# EAGLE board smartwatch-top (EAGLE 9.6.1)

Size 38 x 38 mm. Coordinates in mm from the lower left corner, seen from the top.
Outline: 0,0 38,0 38,38 0,38 0,0
Copper layers (1*16): Top 0.035mm / dielectric 1.5mm / Bottom 0.035mm
Design rules "default": minimum track width 6mil, minimum drill 0.35mm, track to track 6mil, track to pad 6mil, pad to pad 6mil, via to via 6mil, smd to smd 6mil, copper to edge 40mil, drill to drill 6mil, minimum pad ring 10mil, minimum via ring 8mil, stop-mask expansion 4mil, vias tented up to drill 0mil, thermal gap 10mil

## Footprints (pad centres in the part's own frame; a part is rotated, then mirrored left to right if it is on the bottom)
C0603 = smd 1.1 x 1: 1 -0.85,0; 2 0.85,0
C0402 = smd 0.7 x 0.9: 1 -0.65,0; 2 0.65,0
C0805 = smd 1.3 x 1.5: 1 -0.95,0; 2 0.95,0
SOT23-5 = smd 0.55 x 1.2: 1 -0.95,-1.3; 2 0,-1.3; 3 0.95,-1.3; 4 0.95,1.3; 5 -0.95,1.3
2X5-PTH-1.27MM = drill 0.508 pad 1: 1 -2.54,-0.635; 2 -2.54,0.635; 3 -1.27,-0.635; 4 -1.27,0.635; 5 0,-0.635; 6 0,0.635; 7 1.27,-0.635; 8 1.27,0.635; 9 2.54,-0.635; 10 2.54,0.635
USC = smd 0.8 x 0.6: + -1.15,0; - 1.15,0
1X02 = drill 1.016 pad 1.88: 1 0,0; 2 2.54,0
SMT-JUMPER_2_NO_SILK = smd 0.635 x 1.27: 1 -0.406,0; 2 0.406,0
L0603 = smd 1 x 1.1: 1 -0.85,0; 2 0.85,0
LED-0603 = smd 1 x 1: A -0.877,0; C 0.877,0
R0603 = smd 1 x 1.1: 1 -0.85,0; 2 0.85,0
MICROSD = smd 0.7 x 1.5: 1 9,-10.64; 2 7.9,-10.24; 3 6.8,-10.64; 4 5.7,-11.04; 5 4.6,-10.64; 6 3.5,-11.04; 7 2.4,-10.64; 8 1.3,-10.64 | smd 1.8 x 1.4: CD1 2,-0.44; CD2 8,-0.44 | smd 1.4 x 1.9: MT1 0.4,-13.54; MT2 13.6,-14.44
BUTTON-GULLWING = smd 0.7 x 0.75: 1 -1.6,0.825; 2 1.6,0.825; 3 -1.6,-0.825; 4 1.6,-0.825
SSOP20_L = smd 0.381 x 1.143: 1 -2.857,-2.68; 2 -2.223,-2.68; 3 -1.587,-2.68; 4 -0.953,-2.68; 5 -0.318,-2.68; 6 0.318,-2.68; 7 0.953,-2.68; 8 1.587,-2.68; 9 2.223,-2.68; 10 2.857,-2.68; 11 2.857,2.68; 12 2.223,2.68; 13 1.587,2.68; 14 0.953,2.68; 15 0.318,2.68; 16 -0.318,2.68; 17 -0.953,2.68; 18 -1.587,2.68; 19 -2.223,2.68; 20 -2.857,2.68
UG-2864HSWEG01_0.96IN_NO-WRAPAROUND = smd 0.35 x 2.2: 1 -10.15,-1.2; 2 -9.45,-1.2; 3 -8.75,-1.2; 4 -8.05,-1.2; 5 -7.35,-1.2; 6 -6.65,-1.2; 7 -5.95,-1.2; 8 -5.25,-1.2; 9 -4.55,-1.2; 10 -3.85,-1.2; 11 -3.15,-1.2; 12 -2.45,-1.2; 13 -1.75,-1.2; 14 -1.05,-1.2; 15 -0.35,-1.2; 16 0.35,-1.2; 17 1.05,-1.2; 18 1.75,-1.2; 19 2.45,-1.2; 20 3.15,-1.2; 21 3.85,-1.2; 22 4.55,-1.2; 23 5.25,-1.2; 24 5.95,-1.2; 25 6.65,-1.2; 26 7.35,-1.2; 27 8.05,-1.2; 28 8.75,-1.2; 29 9.45,-1.2; 30 10.15,-1.2
BLE_MODULE_RAYTAC_MDBT42 = smd 1.6 x 0.9: 1 -4.6,3.8; 39 4.6,3.8 | smd 1.6 x 0.48: 2 -4.6,0.8; 3 -4.6,0.1; 4 -4.6,-0.6; 5 -4.6,-1.3; 6 -4.6,-2; 7 -4.6,-2.7; 8 -4.6,-3.4; 9 -4.6,-4.1; 10 -4.6,-4.8; 11 -4.6,-5.5; 25 4.6,-6.2; 26 4.6,-5.5; 27 4.6,-4.8; 28 4.6,-4.1; 29 4.6,-3.4; 30 4.6,-2.7; 31 4.6,-2; 32 4.6,-1.3; 33 4.6,-0.6; 34 4.6,0.1; 35 4.6,0.8; 36 4.6,1.5; 37 4.6,2.2; 38 4.6,2.9 | smd 0.48 x 1.6: 12 -4.2,-7.65; 13 -3.5,-7.65; 14 -2.8,-7.65; 15 -2.1,-7.65; 16 -1.4,-7.65; 17 -0.7,-7.65; 18 0,-7.65; 19 0.7,-7.65; 20 1.4,-7.65; 21 2.1,-7.65; 22 2.8,-7.65; 23 3.5,-7.65; 24 4.2,-7.65 | smd 1.2 x 0.5: 40 2.9,3.25; 41 2.9,1.85
SO8 = smd 1.3 x 0.6: 1 -2.65,1.905; 2 -2.65,0.635; 3 -2.65,-0.635; 4 -2.65,-1.905; 5 2.65,-1.905; 6 2.65,-0.635; 7 2.65,0.635; 8 2.65,1.905
TACTILE_SWITCH_SMD_6.2MM_TALL = smd 1.55 x 1.3: A1 -3.975,-2.25; A2 3.975,-2.25; B1 -3.975,2.25; B2 3.975,2.25
USB-MICRO-01.BIGGERPADS = smd 0.4 x 1.7: 1 -1.3,1.505; 2 -0.65,1.505; 3 0,1.505; 4 0.65,1.505; 5 1.3,1.505 | smd 1.9 x 1.9: S1 -3.85,-1.27; S2 -1.2,-1.27; S3 1.2,-1.27; S4 3.85,-1.27 | smd 2.1 x 1.6: S5 -3.1,1.28; S6 3.1,1.28
2-SMD.NOLEAD.2.0MMTO1.2MM = smd 0.7 x 1.3: P$1 -0.8,0; P$2 0.8,0

## Placement (x,y rotation side)
C2  1u  [C0603]  10.77,-6.05 180 top  (outside the outline)
C4  100n  [C0603]  76.99,52.22 0 top  (outside the outline)
C5  47p  [C0603]  76.99,47.14 0 top  (outside the outline)
C6  47p  [C0603]  76.99,42.06 0 top  (outside the outline)
C11  1u  [C0603]  8.56,6.38 90 top
C12  1u  [C0603]  9.78,2.74 270 top
C14  2.2uF  [C0402]  4.83,25.25 90 top
C15  2.2uF  [C0402]  6.22,25.37 90 top
C16  10uF  [C0603]  29.34,24.82 270 top
C17  2.2uF  [C0402]  8.89,25.32 270 top
C18  2.2uF  [C0402]  27.74,24.46 90 top
C19  2.2uF  [C0402]  7.57,25.35 270 top
C20  4.7u  [C0603]  6.22,2.62 90 top
C21  4.7u  [C0603]  6.65,10.59 270 top
C26  1u  [C0603]  47.6,12.52 270 top  (outside the outline)
C27  [C0603]  49.38,2.62 0 top  (outside the outline)
C28  [C0603]  53.31,2.49 0 top  (outside the outline)
C29  300p  [C0603]  58.65,3.12 0 top  (outside the outline)
C30  300p  [C0603]  58.27,5.28 0 top  (outside the outline)
C31  10u  [C0805]  46.46,8.59 0 top  (outside the outline)
C32  100n  [C0603]  73.38,5.79 270 top  (outside the outline)
CHRG2  MCP73831  [SOT23-5]  3.07,2.29 270 top
CORTEX3  CORTEX_DEBUG_PTH  [2X5-PTH-1.27MM]  64.74,17.86 180 top  (outside the outline)
D3  [USC]  70.84,5.92 90 top  (outside the outline)
D4  [USC]  2.59,7.21 0 top
D5  [USC]  2.67,5.33 0 top
J2  [1X02]  1.91,17.2 270 top
JP2  [SMT-JUMPER_2_NO_SILK]  63.3,43.41 270 top  (outside the outline)
L3  10u  [L0603]  45.57,12.78 90 top  (outside the outline)
LDO2  MIC5504  [SOT23-5]  13.31,10.92 270 top
LED3  RED  [LED-0603]  80.82,51.97 0 top  (outside the outline)
LED4  YELLOW  [LED-0603]  80.82,48.16 0 top  (outside the outline)
LED5  RED  [LED-0603]  66.4,11.89 0 top  (outside the outline)
LED6  BLUE  [LED-0603]  66.65,14.17 0 top  (outside the outline)
R1  0  [R0603]  -17.25,-2.69 0 top  (outside the outline)
R2  0  [R0603]  -17.25,-5.38 0 top  (outside the outline)
R3  10k  [R0603]  -17.25,-15.39 0 top  (outside the outline)
R4  10k  [R0603]  -17.25,-18.08 0 top  (outside the outline)
R5  10k  [R0603]  11.35,6.65 90 top
R7  390k  [R0603]  4.57,10.54 90 top
R10  27  [R0603]  63.47,50.04 0 top  (outside the outline)
R11  [R0603]  7.77,2.59 90 top
R12  100k  [R0603]  9.17,10.34 90 top
R13  100k  [R0603]  6.2,6.27 90 top
R14  100k  [R0603]  1.57,10.57 90 top
R15  100k  [R0603]  11.96,2.69 90 top
R16  1k  [R0603]  62.59,12.14 180 top  (outside the outline)
R17  1k  [R0603]  63.09,14.17 180 top  (outside the outline)
R18  10k  [R0603]  68.43,6.05 90 top  (outside the outline)
R19  27  [R0603]  64.19,46.81 0 top  (outside the outline)
R20  1k  [R0603]  80.82,44.35 0 top  (outside the outline)
R21  1k  [R0603]  80.82,40.54 0 top  (outside the outline)
SD2  [MICROSD]  21.11,15.44 270 bottom
SW5  [BUTTON-GULLWING]  71.86,17.48 0 top  (outside the outline)
SW6  [BUTTON-GULLWING]  64.74,6.05 180 top  (outside the outline)
U2  FT231XS  [SSOP20_L]  19.15,27.51 270 top
U3  [UG-2864HSWEG01_0.96IN_NO-WRAPAROUND]  18.72,19.68 0 top
U5  NRF52832_MODULE_MDBT42  [BLE_MODULE_RAYTAC_MDBT42]  31.95,29.49 0 top
U6  PCF8523  [SO8]  8.97,-9.65 0 top  (outside the outline)
U$1  SWITCH.MOM  [TACTILE_SWITCH_SMD_6.2MM_TALL]  31.83,4.06 0 top
U$2  SWITCH.MOM  [TACTILE_SWITCH_SMD_6.2MM_TALL]  20.42,4.06 0 top
USB2  USB.MICRO-BIGGERPADS  [USB-MICRO-01.BIGGERPADS]  3.12,7.39 90 bottom
XTAL2  32.7680kHz  [2-SMD.NOLEAD.2.0MMTO1.2MM]  4.39,-8.18 90 top  (outside the outline)
XTAL4  32.768kHz  [2-SMD.NOLEAD.2.0MMTO1.2MM]  51.41,4.39 0 top  (outside the outline)

## Library data of the parts
C2 C4-C6 C11 C12 C14-C21 C26-C32 L3 R1-R5 R7 R10-R21 = LinnesLab-Passives
CHRG2 = LinnesLab-Power; PROD_ID: IC-09995
CORTEX3 J2 SD2 USB2 = LinnesLab-Connectors
D3-D5 = LinnesLab-DiscreteSemi
JP2 SW5 SW6 U$1 U$2 = LinnesLab-Switches
LDO2 = LinnesLab-Power
LED3-LED6 = LinnesLab-LED
U2 = LinnesLab-DigitalIC; DIGIKEY: 768-1156-5-ND; MFN: FT231XS-U
U3 = LinnesLab-Displays
U5 = LinnesLab-Microcontrollers
U6 = LinnesLab-Clocks; DIGIKEY: 568-5306-1-ND; I2C_ADDRESS: 0x68h; MFN: PCF8523T/1,118; MFN_MANUFACTURER: NXP USA Inc.
XTAL2 XTAL4 = LinnesLab-Clocks; DIGIKEY: XC2288CT-ND; FREQ: 32.7680KHZ; LOAD_CAP: 12.5pF

## Nets
3.3V: C2.1 C4.2 C12.1 C17.2 C19.2 C31.2 CORTEX3.1 D3.- LDO2.5 LED3.A LED4.A R3.2 R4.2 R15.2 R18.2 SD2.4 U2.3 U2.14 U3.6 U3.9 U5.11 U6.8
!CTS: JP2.2 U2.9
BATT: R13.1 R14.2
CD1: SD2.CD1
CD2: SD2.CD2
CHRG.STAT: CHRG2.1 R12.1
CS.OLED: U3.13
DC.OLED: U3.15
DFU: SW5.3 U5.34
DTR: C32.1 U2.1
FRST: U5.38
FT3V3: U2.13
GND: C2.2 C4.1 C5.2 C6.1 C11.1 C12.2 C16.1 C17.1 C18.1 C19.1 C20.2 C21.1 C26.2 C27.1 C28.2 C29.2 C30.2 C31.1 CHRG2.2 CORTEX3.3 CORTEX3.5 CORTEX3.7 CORTEX3.9 J2.1 JP2.1 LDO2.2 LED5.C LED6.C R5.1 R7.2 R11.1 R14.1 R15.1 SD2.6 SD2.MT1 SD2.MT2 SW5.1 SW6.3 U2.6 U2.16 U3.1 U3.8 U3.10 U3.12 U3.29 U3.30 U5.1 U5.12 U5.24 U5.39 U6.4 USB2.5
LED1: R16.2 U5.31
LED2: R17.2 U5.33
MISO: SD2.7 U5.28
MOSI: SD2.3 U3.19 U5.27
N$2: R2.1
N$3: R4.1
N$4: R5.2 U3.11
N$5: U6.2 XTAL2.P$1
N$6: R7.1 U3.26
N$7: R10.2 U2.12
N$8: R19.2 U2.11
N$9: C14.2 U3.2
N$10: C14.1 U3.3
N$11: C15.2 U3.4
N$12: C15.1 U3.5
N$14: C16.2 U3.28
N$15: C18.2 U3.27
N$16: U$1.B1 U$1.B2 U$2.B1 U$2.B2
N$17: CHRG2.5 R11.2
N$18: LED3.C R20.2
N$21: LED4.C R21.2
N$22: U6.1 XTAL2.P$2
N$27: C27.2 U5.13 XTAL4.P$1
N$28: C28.1 U5.14 XTAL4.P$2
N$29: LED5.A R16.1
N$30: LED6.A R17.1
N$31: L3.1 U5.10
N$32: C26.1 L3.2 U5.9
N$33: CORTEX3.8
P0.09/NFC1: C30.1 U5.22
P0.10/NFC2: C29.1 U5.23
RESET: C32.2 CORTEX3.10 D3.+ R18.1 SW6.1 U5.35
RESET.OLED: U3.14
RXD.FT: U2.4
RXD.NRF: R1.2 U5.21
RXLED: R20.1 U2.17
SCK: SD2.5 U3.18 U5.26
SCL: U5.3 U6.6
SD.CS: SD2.2
SDA: R3.1 U5.2 U6.5
SW1: U$1.A1 U$2.A1
SWCLK: CORTEX3.4 U5.36
SWDIO: CORTEX3.2 U5.37
SWO: CORTEX3.6 U5.32
TXD.FT: R1.1 U2.20
TXD.NRF: R2.2 U5.19
TXLED: R21.1 U2.10
USB+: C5.1 R19.1 USB2.3
USB-: C6.2 R10.1 USB2.2
V_USB: D5.+ U2.15 USB2.1
VBAT: U6.3
VIN: C11.2 C21.2 CHRG2.4 D4.- D5.- LDO2.1 LDO2.3 R12.2
VLIPO: C20.1 CHRG2.3 D4.+ J2.2 R13.2

## Tracks (layer width: path | path; a pad name or v marks a point on that pad's centre or on a via)
3.3V  (21 unrouted)
!CTS  (1 unrouted)
BATT  (1 unrouted)
CHRG.STAT  (1 unrouted)
DFU  (1 unrouted)
DTR  (1 unrouted)
GND  (51 unrouted)
LED1  (1 unrouted)
LED2  (1 unrouted)
MISO  (1 unrouted)
MOSI  (2 unrouted)
N$4  (1 unrouted)
N$5  (1 unrouted)
N$6  (1 unrouted)
N$7  (1 unrouted)
N$8  (1 unrouted)
N$9  (1 unrouted)
N$10  (1 unrouted)
N$11  (1 unrouted)
N$12  (1 unrouted)
N$14  (1 unrouted)
N$15  (1 unrouted)
N$16  (3 unrouted)
N$17  (1 unrouted)
N$18  (1 unrouted)
N$21  (1 unrouted)
N$22  (1 unrouted)
N$27  (2 unrouted)
N$28  (2 unrouted)
N$29  (1 unrouted)
N$30  (1 unrouted)
N$31  (1 unrouted)
N$32  (2 unrouted)
P0.09/NFC1  (1 unrouted)
P0.10/NFC2  (1 unrouted)
RESET  (5 unrouted)
RXD.NRF  (1 unrouted)
RXLED  (1 unrouted)
SCK  (2 unrouted)
SCL  (1 unrouted)
SDA  (2 unrouted)
SW1  (1 unrouted)
SWCLK  (1 unrouted)
SWDIO  (1 unrouted)
SWO  (1 unrouted)
TXD.FT  (1 unrouted)
TXD.NRF  (1 unrouted)
TXLED  (1 unrouted)
USB+  (2 unrouted)
USB-  (2 unrouted)
V_USB  (2 unrouted)
VIN  (7 unrouted)
VLIPO  (4 unrouted)